# EAGLE board CNR_Temp_Sens_Eagle4 (EAGLE 7.5.0)
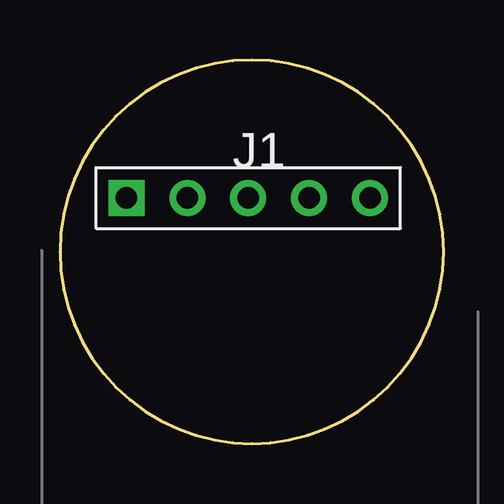
[diagram p0: board, top side]
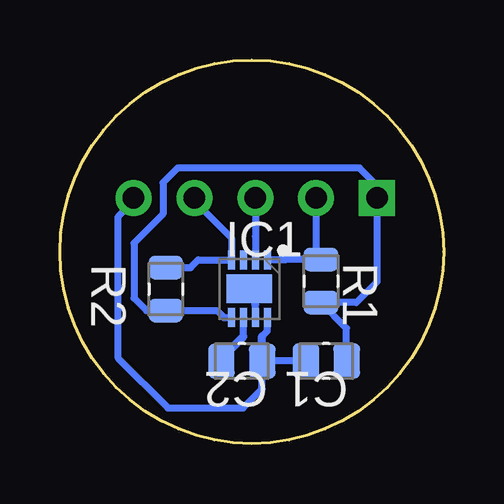
[diagram p1: board, bottom side, seen from below]

Size 16 x 16 mm. Coordinates in mm from the lower left corner, seen from the top.
Outline: 2.34,2.34 arc180 13.66,13.66 arc180 2.34,2.34
Copper layers (1*16): Top 0.035mm / dielectric 1.5mm / Bottom 0.035mm
Design rules "default *": minimum track width 10mil, minimum drill 0.61mm, track to track 8mil, track to pad 8mil, pad to pad 8mil, via to via 8mil, smd to smd 8mil, copper to edge 40mil, drill to drill 8mil, minimum pad ring 0mil, minimum via ring 8mil, stop-mask expansion 2mil, vias tented up to drill 19mil, thermal gap 10mil
Net classes: 0 Default: width 0.33 mm, clearance 0.33 mm

## Footprints (pad centres in the part's own frame; a part is rotated, then mirrored left to right if it is on the bottom)
CAP_0805_N = smd 1.11 x 1.47: 1 -0.85,0; 2 0.85,0
SON50P250X250X100-9N-D = smd 0.8 x 0.3: 1 -1.2,0.75; 2 -1.2,0.25; 3 -1.2,-0.25; 4 -1.2,-0.75; 5 1.2,-0.75; 6 1.2,-0.25; 7 1.2,0.25; 8 1.2,0.75 | smd 1.2 x 1.9: 9 0,0
HDR-1x5 = drill 0.9 pad 1.5 square: 1 -5.08,0 | drill 0.9 pad 1.5: 2 -2.54,0; 3 0,0; 4 2.54,0; 5 5.08,0
RES_0805_N = smd 0.98 x 1.42: 1 -0.895,0; 2 0.895,0
RES_0805_N_R2 = smd 0.98 x 1.42: 1 -0.895,0; 2 0.895,0

## Placement (x,y rotation side)
C1  100nF  [CAP_0805_N]  4.89,3.44 180 bottom
C2  100nF  [CAP_0805_N]  8.42,3.44 180 bottom
IC1  SHT35-DIS-B  [SON50P250X250X100-9N-D]  8.1,6.46 270 bottom
J1  HDR-1X5  [HDR-1x5]  7.85,10.24 0 top
R1  15k  [RES_0805_N]  5.11,6.77 270 bottom
R2  15k  [RES_0805_N_R2]  11.58,6.44 270 bottom

## Library data of the parts
C1 C2 = common; UNIQUE_NAME: CAP_0805_INCH
IC1 = common; DATASHEET: https://componentsearchengine.com/Datasheets/1/SHT35-DIS-B.pdf; DESCRIPTION: RH&T Sensor +/-1.5%RH +/-0.2C DFN8 Sensirion SHT35-DIS-B Temperature & Humidity Sensor, -40 +125 C, 8-Pin DFN; HEIGHT: 1 mm; MANUFACTURER: Sensirion; MANUFACTURER_NAME: Sensirion; MANUFACTURER_PART_NUMBER: SHT35-DIS-B; MOUSER_PART_NUMBER: 403-SHT35-DIS-B; MOUSER_PRICE/STOCK: https://www.mouser.com/Search/Refine.aspx?Keyword=403-SHT35-DIS-B
J1 = common; UNIQUE_NAME: HDR-1x5
R1 R2 = common; UNIQUE_NAME: RES_0805_INCH

## Nets
ADDR: IC1.2 J1.3
GND: C1.2 C2.1 IC1.7 IC1.8 IC1.9 J1.5
RESET: C2.2 IC1.6
SCL: IC1.4 J1.4 R2.1
SDA: IC1.1 J1.2 R1.1
VCC: C1.1 IC1.5 J1.1 R1.2 R2.2

## Tracks (layer width: path | path; a pad name or v marks a point on that pad's centre or on a via)
ADDR
  Bottom 0.3: J1.3 7.85,8.64 IC1.2
GND
  Bottom 0.3: IC1.7 7.85,5.82 | 7.57,4.47 7.35,4.69 IC1.8 | C1.2 C2.1 7.57,2.28 8.36,1.48 11.49,1.48 13.59,3.58 13.59,9.44 12.93,10.1 J1.5
  Bottom 0.33: 7.85,5.82 7.85,6.21 IC1.9 | C2.1 7.57,4.47
RESET
  Bottom 0.3: 8.35,4.46 IC1.6
  Bottom 0.33: C2.2 9.27,3.54 8.35,4.46
SCL
  Bottom 0.3: R2.1 10.55,7.34 10.23,7.66 IC1.4 8.85,8.58 10.39,10.12 J1.4
SDA
  Bottom 0.3: J1.2 5.31,7.67 R1.1 6.59,7.67 6.6,7.66 IC1.1
VCC
  Bottom 0.3: IC1.5 9.16,5.26 9.45,5.55 R2.2 12.39,5.55 12.91,6.07 12.91,8.36 11.7,9.57 11.7,10.88 11.09,11.49 3.5,11.49 2.77,10.76 J1.1 2.77,6.74 3.64,5.88 R1.2 4.04,4.81 C1.1

## Text on the board
tPlace: J1
bPlace: IC1 | R1 | R2 | C1 | C2